# Altium PCB MAGI'sDIPBoard-Python-InstallGuide.PcbDoc
Units mil, origin at the board's own origin, x right, y up, seen from the top; angles counter-clockwise.
Board outline 6000 x 4000 mil, 2 copper layers (Top Layer, Bottom Layer); 28 components, 52 nets, 199 pads, 14 vias.
Unrouted connection lines stored in the file: 2.
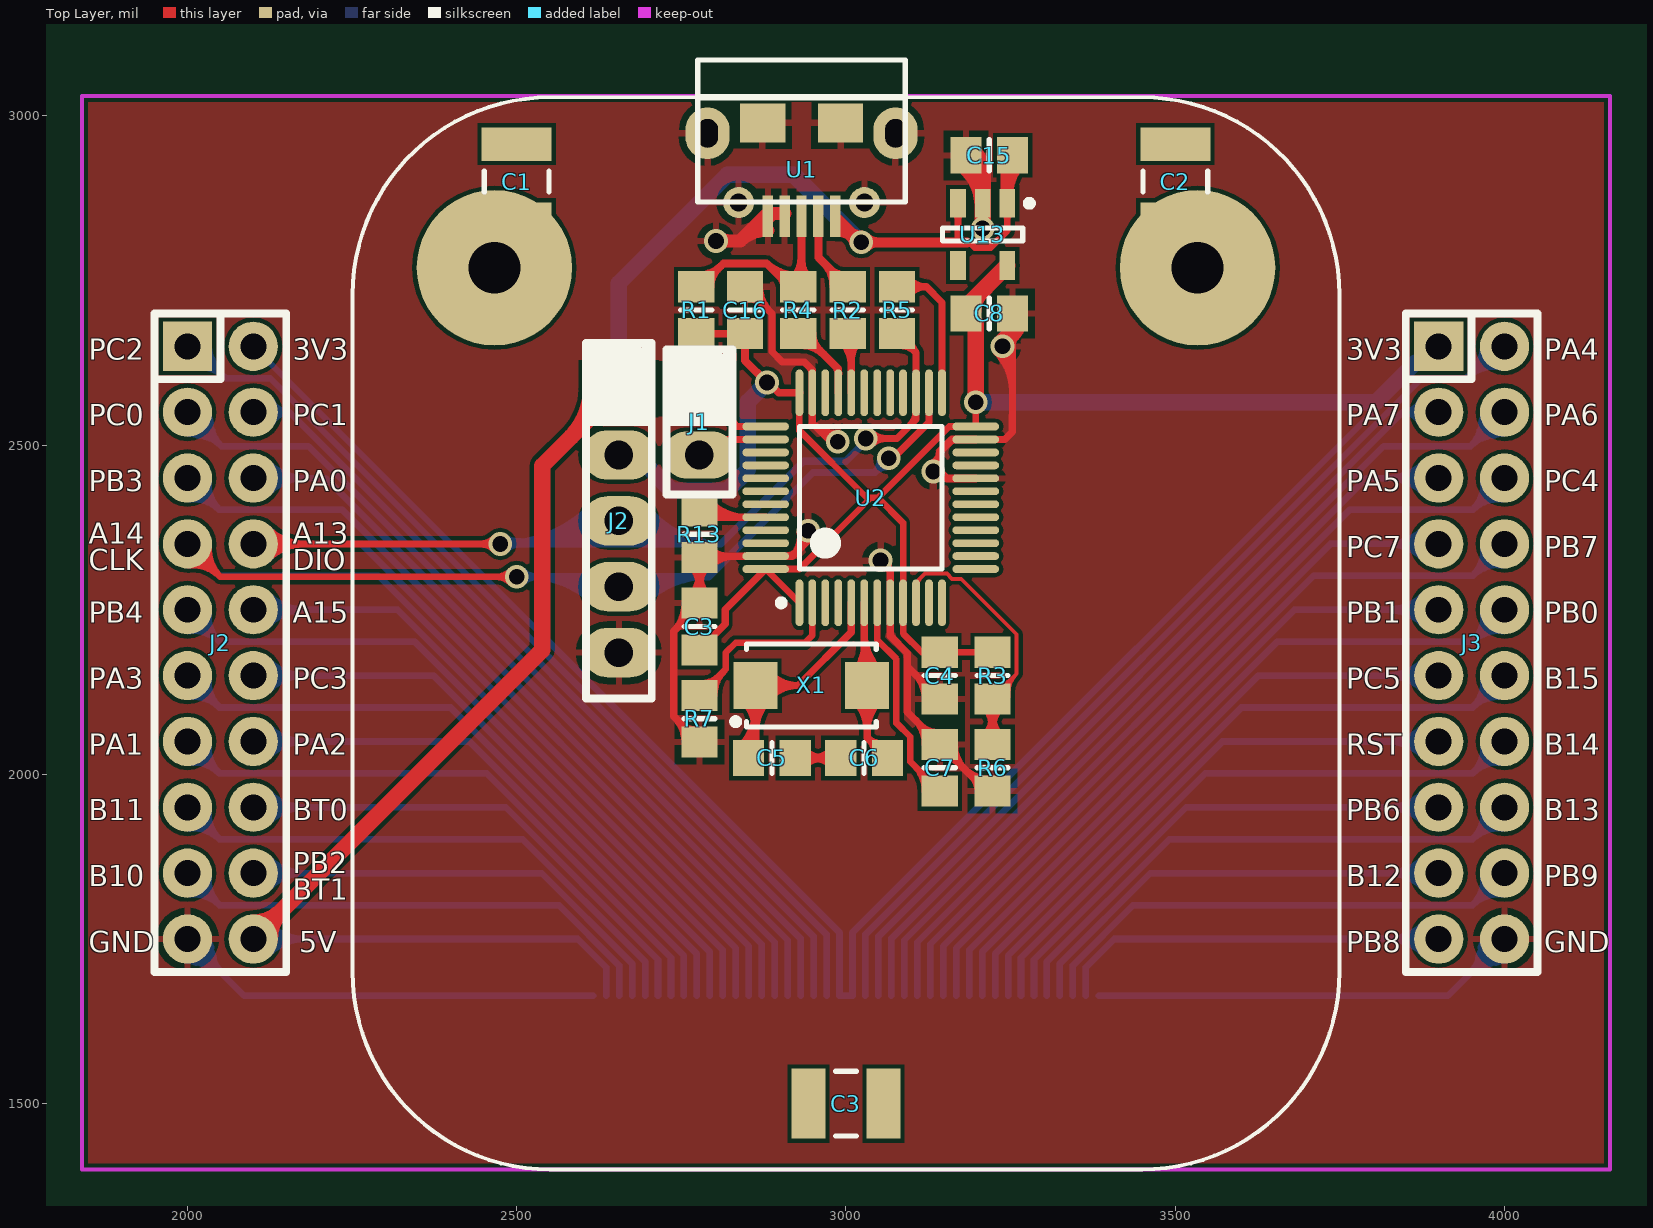
[diagram p0: Top Layer view]
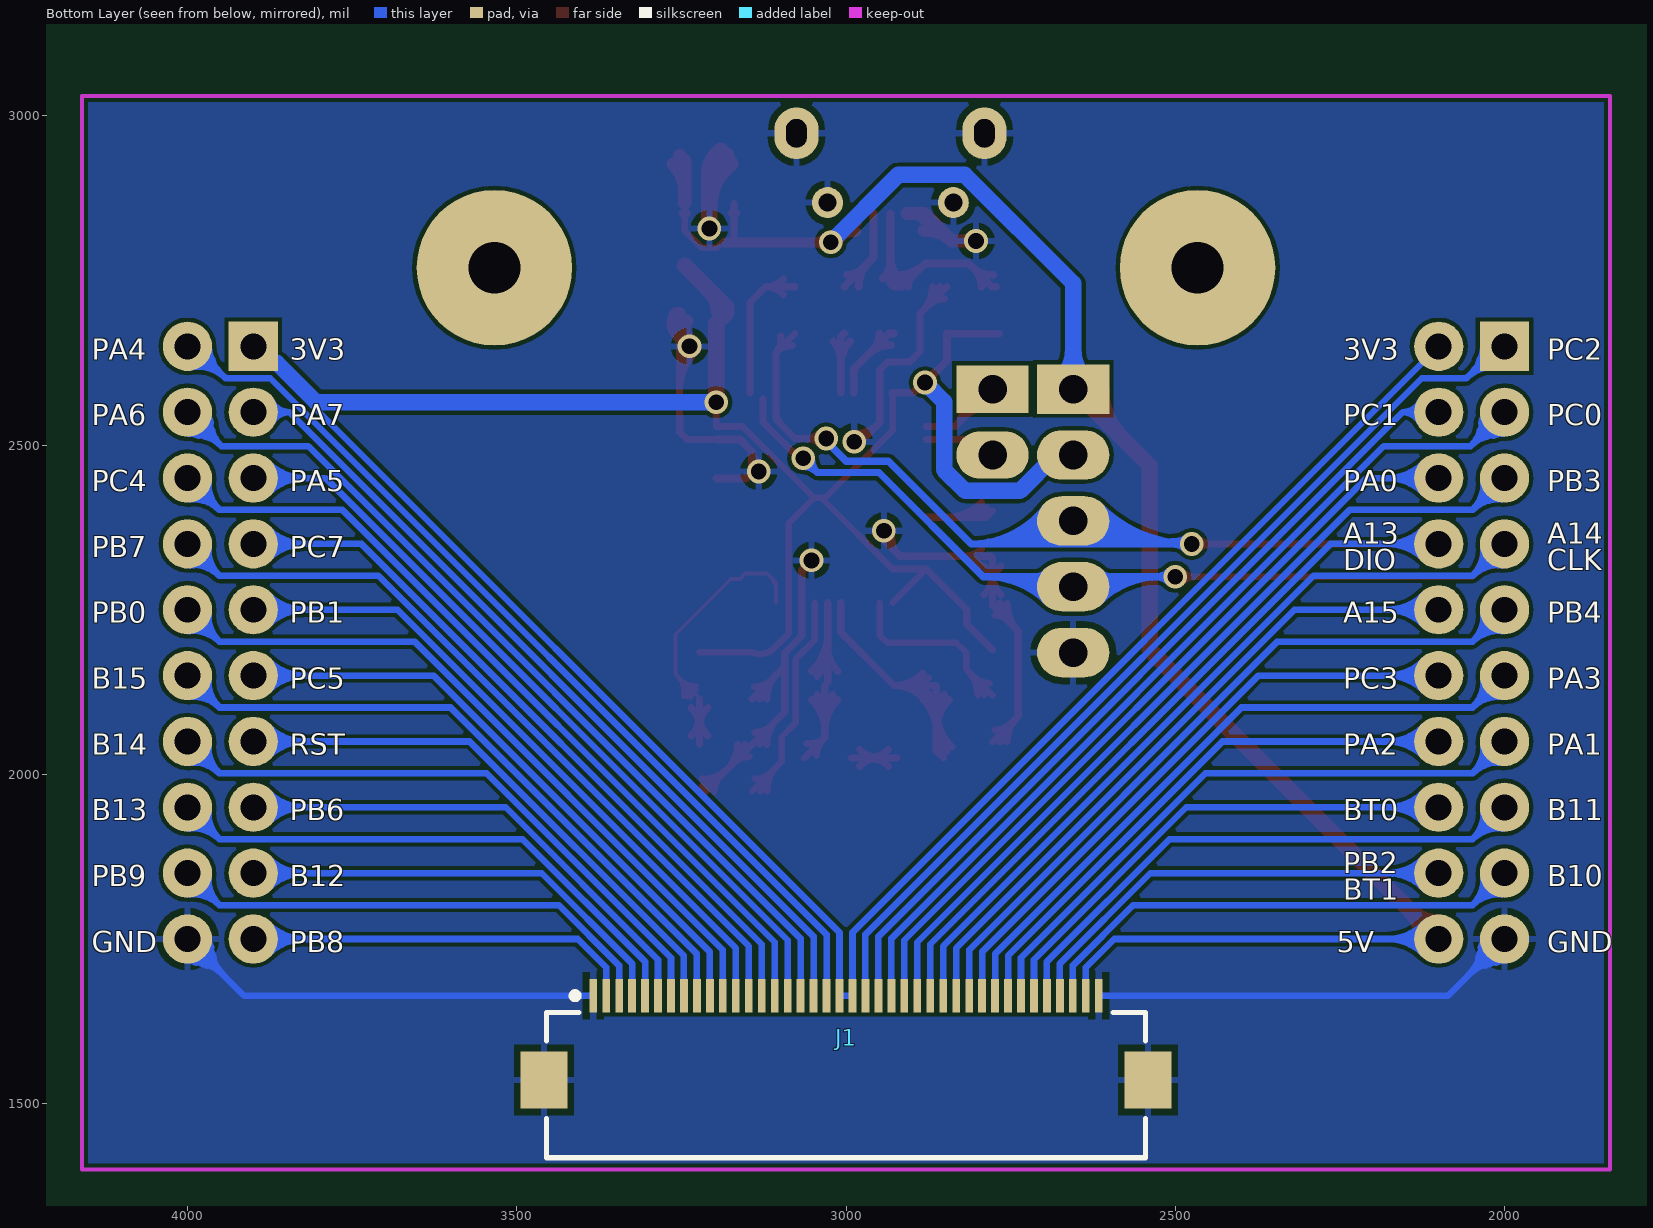
[diagram p1: Bottom Layer view, seen from below]

## Layer stack, top to bottom
Top Solder: solder mask 0.4, Solder Resist, Dk 3.5
Top Layer: signal copper 1.4
Dielectric 1: dielectric 12.6, FR-4, Dk 4.8
Bottom Layer: signal copper 1.4
Bottom Solder: solder mask 0.4, Solder Resist, Dk 3.5

## Board outline
1000,1000 7000,1000 7000,5000 1000,5000

## Design rules (kind name [scope] priority, off if disabled: settings)
Clearance [All] p1: gap=6
PolygonConnect [All] p1: connectstyle=Relief reliefconductorwidth=10 reliefentries=4 polygonreliefangle="90 Angle" airgapwidth=10
RoutingVias [All] p1: holewidth=28 width=50 viastyle="Through Hole" minholewidth=28 minwidth=50 maxholewidth=28 maxwidth=50
SolderMaskExpansion [All] p1: expansion=4
Width [All] p1: maxlimit=10000 minlimit=6 preferedwidth=10
29 further rules are at their usual default settings.

## Classes and differential pairs
component class MAGI'sDIPBoard-FPC: C1 C2 C3 J1 J2 J3

## Components (designator, comment, footprint, x,y, rotation, side; value= is the part's Value field where it differs from the comment)
C1 "22uf" C1210_N 2500,2900 r90 top
C2 "22uf" C1210_N 3500,2900 r90 top
C3 "22uf" C1210_N 3000,1500 r0 top
C3 "10uf" 6-0805_n 2777.5,2224.57 r90 top
C4 "10uf" 6-0805_N 3142.5,2150 r270 top
C5 "15PF" 6-0805_n 2887.5,2025 r180 top
C6 "15PF" 6-0805_n 3027.5,2025 r0 top
C7 "104" 6-0805_n 3142.5,2010 r270 top
C8 "10uf" 6-0805_N 3217.5,2700 r0 top
C15 "10uf" 6-0805_n 3217.5,2940 r180 top
C16 "10uf" 6-0805_n 2846.75,2705 r90 top
J1 "FPC-40P" FFC/SM0.5-2H40 3000,1600 r180 bottom
J1 "CON2" SIP2 2777.5,2585 r270 top
J2 "IDC-20" IDC-20 2000,2650 r270 top
J2 "CON5" SIP5 2655,2585 r270 top
J3 "IDC-20" IDC-20 3900,2650 r270 top
R1 "10K" 6-0805_n 2772.5,2705 r90 top
R2 "10K" 6-0805_n 3002.5,2705 r270 top
R3 "10K" 6-0805_n 3222.5,2150 r90 top
R4 "10K" 6-0805_n 2927.5,2705 r270 top
R5 "100" 6-0805_n 3077.5,2705 r90 top
R6 "10K" 6-0805_n 3222.5,2010 r90 top
R7 "10K" 6-0805_n 2777.5,2084.57 r90 top
R13 "10K" 6-0805_n 2777.5,2364.57 r90 top
U1 "MicroUSB" MicroUSB-B 2932.5,2940 r0 top
U2 "STM32F103CBT6" LQFP48_N 3037.5,2420 r90 top
U13 "MCP1802" MCP1802 3207.5,2820 r270 top
X1 "8M" 5032 2957.5,2135 r270 top

## Footprints (in the part's own frame and the unit in brackets; to place one, negate y for a bottom-side part, rotate by r counter-clockwise, add the part's x,y. Pads: shape width x height; smd on the part's side, far side on the other; paste and mask are expansions set on the pad)
6-0805_n [mm] "Chip Resistor, Body 2.0x1.2mm, IPC Medium Density"
  rect 1.2x1.4 smd: 1(-0.9,0) 2(0.9,0)
  silkscreen extent 0,-0.6 0,0.6, body extent -1.07,-0.7 1.07,0.7, height 0.7
6-0805_N [mm] "Chip Resistor, Body 2.0x1.2mm, IPC Medium Density"
  rect 1.2x1.4 smd: 1(-0.9,0) 2(0.9,0)
  silkscreen extent 0,-0.6 0,0.6, body extent -1.07,-0.7 1.07,0.7, height 0.7
5032 [mm]
  rect 1.8x1.7 smd: 1(0,-2.404) 2(0,1.896)
  silkscreen extent -1.6,-3.3 1.6,2.25
C1210_N [mm] "Chip Capacitor, Body 3.2x2.5mm, IPC Medium Density"
  rect 1.3x2.7 smd: 1(-1.45,0) 2(1.45,0)
  silkscreen extent -0.4,-1.25 0.4,1.25, body extent -1.7,-1.35 1.7,1.35, height 1.5
FFC/SM0.5-2H40 [mm] "Connector; FH12 Series; 40 Position; 0.5mm Spaced Bottom Contact"
  rect 0.3x1.3 smd: 1(-9.75,1.625) 2(-9.25,1.625) 3(-8.75,1.625) 4(-8.25,1.625) 5(-7.75,1.625) 6(-7.25,1.625) 7(-6.75,1.625) 8(-6.25,1.625) 9(-5.75,1.625) 10(-5.25,1.625) 11(-4.75,1.625) 12(-4.25,1.625) 13(-3.75,1.625) 14(-3.25,1.625) 15(-2.75,1.625) 16(-2.25,1.625) 17(-1.75,1.625) 18(-1.25,1.625) 19(-0.75,1.625) 20(-0.25,1.625) 21(0.25,1.625) 22(0.75,1.625) 23(1.25,1.625) 24(1.75,1.625) 25(2.25,1.625) 26(2.75,1.625) 27(3.25,1.625) 28(3.75,1.625) 29(4.25,1.625) 30(4.75,1.625) 31(5.25,1.625) 32(5.75,1.625) 33(6.25,1.625) 34(6.75,1.625) 35(7.25,1.625) 36(7.75,1.625) 37(8.25,1.625) 38(8.75,1.625) 39(9.25,1.625) 40(9.75,1.625)
  rect 1.8x2.2 smd: 41(-11.65,-1.625) 42(11.65,-1.625)
  silkscreen extent -11.55,-4.62 11.55,1.75, body extent -11.55,-4.62 11.55,0.97, height 2
IDC-20 [mm]
  rect 1.9x1.9 hole 1: 1(0,0)
  round 1.9 hole 1: 2(0,2.54) 3(2.54,0) 4(2.54,2.54) 5(5.08,0) 6(5.08,2.54) 7(7.62,0) 8(7.62,2.54) 9(10.16,0) 10(10.16,2.54) 11(12.7,0) 12(12.7,2.54) 13(15.24,0) 14(15.24,2.54) 15(17.78,0) 16(17.78,2.54) 17(20.32,0) 18(20.32,2.54) 19(22.86,0) 20(22.86,2.54)
  silkscreen extent -1.27,-1.27 24.13,3.81
LQFP48_N [mm] "Thin QFP, 48-Leads, Body 7x7mm, Pitch 0.5mm, IPC Medium Density"
  oval 1.8x0.3 smd: 1(-4.05,2.75) 2(-4.05,2.25) 3(-4.05,1.75) 4(-4.05,1.25) 5(-4.05,0.75) 6(-4.05,0.25) 7(-4.05,-0.25) 8(-4.05,-0.75) 9(-4.05,-1.25) 10(-4.05,-1.75) 11(-4.05,-2.25) 12(-4.05,-2.75) 25(4.05,-2.75) 26(4.05,-2.25) 27(4.05,-1.75) 28(4.05,-1.25) 29(4.05,-0.75) 30(4.05,-0.25) 31(4.05,0.25) 32(4.05,0.75) 33(4.05,1.25) 34(4.05,1.75) 35(4.05,2.25) 36(4.05,2.75)
  oval 0.3x1.8 smd: 13(-2.75,-4.05) 14(-2.25,-4.05) 15(-1.75,-4.05) 16(-1.25,-4.05) 17(-0.75,-4.05) 18(-0.25,-4.05) 19(0.25,-4.05) 20(0.75,-4.05) 21(1.25,-4.05) 22(1.75,-4.05) 23(2.25,-4.05) 24(2.75,-4.05) 37(2.75,4.05) 38(2.25,4.05) 39(1.75,4.05) 40(1.25,4.05) 41(0.75,4.05) 42(0.25,4.05) 43(-0.25,4.05) 44(-0.75,4.05) 45(-1.25,4.05) 46(-1.75,4.05) 47(-2.25,4.05) 48(-2.75,4.05)
  silkscreen extent -4.17,-2.75 2.75,3.57, body extent -3.5,-3.5 3.5,3.5, height 1.6
MCP1802 [mm] "SOT23, 5-Leads, Body 2.90x2.70mm, Pitch 0.95mm, IPC Medium Density"
  rect 1.1x0.6 smd: 1(-1.2,0.95) 2(-1.2,0) 3(-1.2,-0.95) 4(1.2,-0.95) 5(1.2,0.95)
  silkscreen extent -1.32,-1.55 0.25,1.93, body extent -0.9,-1.55 0.9,1.55, height 1.45
MicroUSB-B [mm]
  oval 1.7x2 hole 0.8 slot 1.1 at 90 deg: 0(-3.625,0.85) 0(3.625,0.85)
  oval 1.7x2 on Top Paste: 0(-3.625,0.85) 0(3.625,0.85)
  round 1.2 hole 0.7: 0(-2.425,-1.825) 0(2.425,-1.825)
  round 1.2 on Top Paste: 0(-2.425,-1.825) 0(2.425,-1.825)
  rect 1.75x1.5 smd: 0(-1.5,1.25) 0(1.5,1.25)
  rect 0.4x1.6 smd: 1(1.3,-2.35) 2(0.65,-2.35) 3(0,-2.35) 4(-0.65,-2.35) 5(-1.3,-2.35)
  silkscreen extent -4,-1.8 4,3.67, body extent -4.1,-1.93 4.1,3.77, height 3
SIP2 [mil]
  rect 72x110 hole 43.31: 1(0,0)
  oval 72x110 hole 43.31: 2(100,0)
  silkscreen extent -60,-50 160,50
SIP5 [mil]
  rect 75x110 hole 43.31: 1(0,0)
  oval 75x110 hole 43.31: 2(100,0) 3(200,0) 4(300,0) 5(400,0)
  silkscreen extent -70,-50 470,50

## Part data
C1 C2 C3 C3 C4 C8 C15 C16: library part "CAPACITOR POL", "Capacitor"
C5 C6 C7: library part CAP
J1: library part CON40, "Connector"
J1 J2: "Connector"
R1 R2 R3 R4 R5 R6 R7 R13: library part RES
U1: library part MicroUSB2.0
U2: "STM32 ARM-based 32-bit MCU with 128 Kbytes Flash, 48-pin LQFP, Industrial Temperature"
X1: library part CRYSTAL

## Free pads (board coordinates)
  round 236.22 hole 78.74: 0(2466.14,2769.29) 0(3533.86,2769.29)

## Via types
v1: diameter 36, hole 24, Top Layer to Bottom Layer, 14 vias

## Nets (pads, with @x,y where several pads share a name; then routed paths per layer and width w, separated by ;. In a path a pad name is that pad's centre, name@x,y a point inside that pad or via, vN(x,y) a via of type N, cw(c..) or ccw(c..) an arc to the next point about the centre after c; other vN are vias at no path point)
3.3V: C3.1@2777.5,2189.13 C4.1 C8.1 C16.1 J1.20 J1.21 J2.2 J3.1 R1.1 R3.2 U2.1 U2.9 U2.24 U2.36 U2.48 U13.5 | length 5563
  Top Layer w10: U2.48 U2.1 ; 2929.23,2311.73 3037.5,2420 ; U2.36 2929.23,2522.26 3031.49,2420 3037.5,2420 ; 3109.72,2191.11 ccw(c3130.04,2211.43) C4.1@3138.99,2184.12 ; C4.1@3115.4,2185.43 3086.71,2214.12 U2.9 3086.71,2381.75 3048.46,2420 ; C4.1 R3.2 ; v1(3196.95,2565) U2.24 3156.73,2528.27 3048.46,2420 ; 3037.5,2420 3048.46,2420
  Top Layer w11: C3.1@2777.5,2189.13 2816.56,2228.19 2816.56,2250.24 U2.48 2929.23,2311.73
  Top Layer w12: R1.1@2767.5,2669.13 C16.1@2842.5,2669.13 ; C16.1 2846.75,2628.25 v1(2880,2595) ; v1@2881.25,2596.25 2898.05,2579.45 U2.36
  Top Layer w25: C8.1@3193.19,2703.94 cw(c3234.48,2703.94) 3205.28,2733.14 ; v1(3196.95,2565) 3196.95,2685.12 C8.1 3182.07,2709.92 U13.5
  Bottom Layer w10: J2.2@2100,2650 2990.16,1759.84 J1.21 J1.20 3009.84,1759.84 J3.1@3875.1,2625.1
  Bottom Layer w25: J2.2@2655,2485 2681.43,2485 2735.93,2430.5 2819.07,2430.5 2851,2462.43 2851,2566 v1(2880,2595) ; v1(3196.95,2565) 3804.39,2565 3864.49,2625.1 3875.1,2625.1 J3.1
5V: C15.1 J1.39 J2.1@2655,2585 J2.20 U1.1 U13.1 U13.3 | length 3739.2
  Top Layer w10: U1.1 U1.1@2983.68,2851.89 ; U13.3@3165.28,2852.59 cw(c3153.65,2840.96) 3170.1,2840.96 cw(c3186.54,2840.96) U13.3@3174.91,2852.59 ; 3170.1,2807.91 U13.3 ; 3183.95,2807.91 3187.49,2807.91 3195.49,2799.91 3219.51,2799.91 3244.9,2825.3 U13.1 ; U13.1@3240.09,2852.59 cw(c3228.46,2840.96) 3244.9,2840.96 cw(c3261.35,2840.96) U13.1@3249.72,2852.59
  Top Layer w15: U1.1@2983.17,2838.48 cw(c2983.91,2817.34) 2998.87,2832.29 ; U1.1@2983.69,2823.48 cw(c2985.57,2770.23) v1(3023.25,2807.91) ; U1.1 v1(3023.25,2807.91) ; v1@3012.75,2807.91 ccw(c2987.4,2807.91) 3005.33,2825.83 ccw(c3023.25,2843.76) v1@3023.25,2818.41 ; v1@3013.11,2805.19 ccw(c2988.62,2798.63) 3001.3,2820.59 ccw(c3013.97,2842.54) v1@3020.53,2818.05 ; v1@3030.68,2800.48 cw(c3048.6,2782.56) 3048.6,2807.91 cw(c3048.6,2833.26) v1@3030.68,2815.33 ; 3183.95,2807.91 3170.1,2807.91 v1(3023.25,2807.91)
  Top Layer w20: U13.1 3244.9,2931.97 C15.1 ; U13.1@3244.9,2883.79 cw(c3305.2,2883.79) C15.1@3262.56,2926.43
  Top Layer w25: J2.20 2538.69,2188.69 2538.69,2468.69 J2.1@2655,2585 ; J2.20@2100,1774.9 ccw(c2100,1835.02) 2142.51,1792.51 ccw(c2185.02,1750) J2.20@2124.9,1750 ; 2582.45,2512.45 ccw(c2509.9,2585) J2.1@2612.5,2585
  Bottom Layer w10: J2.20 2592.71,1750 2635.83,1706.88 J1.39 ; 2154.08,1750 ccw(c2154.08,1695.92) 2115.84,1734.16 cw(c2154.08,1695.92) 2154.08,1750 ; 2154.08,1750 cw(c2154.08,1804.08) 2115.84,1765.84 ccw(c2154.08,1804.08) 2154.08,1750 ; 2178.22,1750 ccw(c2178.22,1671.78) 2122.91,1727.09 cw(c2178.22,1671.78) 2178.22,1750 ; 2178.22,1750 cw(c2178.22,1828.22) 2122.91,1772.91 ccw(c2178.22,1828.22) 2178.22,1750
  Bottom Layer w25: J2.1@2637.32,2602.68 ccw(c2594.64,2645.36) 2655,2645.36 ccw(c2715.36,2645.36) J2.1@2672.68,2602.68 ; J2.1@2655,2585 2655,2745.69 2819.58,2910.27 2920.89,2910.27 v1(3023.25,2807.91)
BOOT0: J1.35 J2.16 R13.2 U2.44 | length 1384.2
  Top Layer w11: R13.2 2787.03,2390.47 U2.44 ; R13.2@2786.47,2405.04 ccw(c2821.63,2440.2) 2821.63,2390.47 ; R13.2@2794.25,2412.81 ccw(c2848.19,2466.75) U2.44@2848.19,2390.47
  Bottom Layer w10: J2.16 2483.22,1950 2714.57,1718.65 J1.35 ; 2154.08,1950 ccw(c2154.08,1895.92) 2115.84,1934.16 cw(c2154.08,1895.92) 2154.08,1950 ; 2154.08,1950 cw(c2154.08,2004.08) 2115.84,1965.84 ccw(c2154.08,2004.08) 2154.08,1950 ; 2178.22,1950 ccw(c2178.22,1871.78) 2122.91,1927.09 cw(c2178.22,1871.78) 2178.22,1950 ; 2178.22,1950 cw(c2178.22,2028.22) 2122.91,1972.91 ccw(c2178.22,2028.22) 2178.22,1950
GND: C3.2@2777.5,2260 C4.2 C7.1 C8.2 C15.2 C16.2 J1.1@3383.86,1663.98 J1.40 J1.41 J1.42 J2.5@2655,2185 J2.19 J3.20 R6.1 R7.1 R13.1 U1.0@2789.78,2973.46 U1.0@2837.03,2868.15 U1.0@2873.44,2989.21 U1.0@2991.56,2989.21 U1.0@3027.97,2868.15 U1.0@3075.22,2973.46 U1.4 U1.5 U2.8 U2.20 U2.23 U2.35 U2.47 U13.2 | length 6493.8
  Top Layer w11: 2739.84,2086.79 cw(c2702.19,2049.13) R7.1@2755.44,2049.13 ; 2749.35,2077.29 ccw(c2773.56,2101.5) R7.1@2773.56,2067.26 ; 2755.19,2234.27 cw(c2773.56,2215.89) C3.2@2773.56,2241.88 ; C3.2@2755.44,2259.66 cw(c2697.37,2258.59) 2738.44,2217.52 ; 2756.74,2235.82 ccw(c2733.3,2259.26) C3.2@2766.44,2259.87 ; R7.1@2758.62,2068.01 cw(c2739.74,2049.13) R7.1@2766.44,2049.13 ; C3.2@2764.69,2272.81 ccw(c2733.75,2303.75) 2777.5,2303.75 ccw(c2821.25,2303.75) C3.2@2790.31,2272.81 ; R13.1@2764.69,2316.32 cw(c2733.75,2285.38) 2777.5,2285.38 cw(c2821.25,2285.38) R13.1@2790.31,2316.32 ; R7.1 2738.44,2088.19 2738.44,2217.52 ; R13.1@2794.25,2316.32 cw(c2830.7,2279.87) 2830.7,2331.42 ; R13.1@2794.25,2341.95 ccw(c2819.67,2367.37) 2819.67,2331.42 ; C16.2 2887.5,2699.68 2887.5,2642.12 2903.24,2626.38 2936.44,2626.38 2948.92,2613.9 U2.35 2948.92,2533.58 v1@2977.5,2505 ; C16.2@2850.69,2722.31 cw(c2850.69,2688.07) 2874.9,2712.28 ; C16.2@2857.81,2740.43 ccw(c2884.51,2740.43) C16.2@2865.63,2721.56 ; C16.2@2868.81,2740.43 ccw(c2922.06,2740.43) 2884.41,2702.78 ; U2.47@2907.58,2331.82 ccw(c2907.58,2360.18) 2927.63,2340.13 ; v1@2930.21,2367.73 cw(c2890.03,2360.31) 2918.92,2331.42 ; 2933.72,2346.22 ccw(c2915.01,2364.92) v1@2941.02,2369.73 ; 2944.74,2618.08 cw(c2935.63,2608.98) U2.35@2948.51,2608.98 ; v1@2947.5,2360 2918.92,2331.42 ; 2949.09,2533.41 ccw(c2987.5,2571.82) v1@2987.5,2517.5 ; 2967.87,2514.63 ccw(c2987.5,2534.26) v1@2987.5,2506.5 ; v1(3052.5,2325) 3067.03,2310.47 ; v1@3056.29,2313.09 cw(c3059.51,2302.95) 3067.03,2310.47 ; v1@3064.41,2321.21 ccw(c3074.55,2317.99) 3067.03,2310.47 ; 3104.84,2083.09 cw(c3067.19,2045.43) C7.1@3120.44,2045.43 ; 3104.84,2152.22 cw(c3067.19,2114.57) C4.2@3120.44,2114.57 ; 3114.35,2073.59 ccw(c3138.56,2097.8) C7.1@3138.56,2063.56 ; 3114.35,2142.72 ccw(c3138.56,2166.93) C4.2@3138.56,2132.69 ; C7.1@3123.62,2064.31 cw(c3104.74,2045.43) C7.1@3131.44,2045.43 ; C4.2@3123.62,2133.44 cw(c3104.74,2114.57) C4.2@3131.44,2114.57 ; C4.2 3093.11,2163.96 ; C7.1@3146.44,2027.31 cw(c3146.44,1993.07) 3170.65,2017.28 ; C7.1@3153.56,2045.43 ccw(c3180.26,2045.43) C7.1@3161.38,2026.56 ; C7.1@3164.56,2045.43 ccw(c3217.81,2045.43) 3180.16,2007.78 ; 3178.76,2009.18 ccw(c3218.56,2048.99) R6.1@3218.56,1992.69 ; 3191.3,1996.63 cw(c3169.24,1974.57) R6.1@3200.44,1974.57 ; U2.23 3241.08,2508.58 3252.5,2520 3252.5,2545 3252.93,2545.43 C8.2 cw(c3206.72,2700) v1@3230.95,2660.64 ; R6.1@3197.53,1990.4 ccw(c3218.56,2011.43) R6.1@3218.56,1981.69 ; R6.1 3213.37,1974.57 C7.1 3093.11,2094.82 3093.11,2163.96 ; v1@3228.66,2641.16 cw(c3170.06,2582.56) 3252.93,2582.56 ; v1@3236.44,2648.94 cw(c3196.62,2609.12) 3252.93,2609.12 ; v1@3236.71,2651.28 ccw(c3218.84,2680.31) C8.2@3252.93,2680.31 ; v1@3236.94,2651.39 ccw(c3222.74,2686.71) C8.2@3259.51,2676.86 ; C8.2@3240.12,2683.25 cw(c3209.18,2652.31) 3252.93,2652.31 cw(c3296.68,2652.31) C8.2@3265.75,2683.25 ; v1@3242.48,2641.91 ccw(c3230.96,2660.62) 3252.93,2660.62 ; v1@3244.22,2656.72 cw(c3223.17,2635.67) 3252.93,2635.67 ; 3248.25,2632.54 ccw(c3243.08,2640.93) v1@3252.93,2640.93 ; 2738.44,2217.52 2777.5,2256.58 2777.5,2260 R13.1 2779.78,2331.42 U2.47 2918.92,2331.42 ; 3067.03,2310.47 U2.8 3067.03,2210.47 3093.11,2184.39 3093.11,2163.96
  Top Layer w12: v1@3128.89,2471.45 ccw(c3123.05,2490) 3142.5,2490 ; v1@3139.75,2450.44 cw(c3145.84,2442.4) 3152.97,2449.53 ; 3156.76,2504.26 cw(c3167.42,2493.6) U2.23@3167.42,2508.68 ; U2.20 3152.97,2449.53 ; U2.23 3161.08,2508.58 3142.5,2490 ; 3142.5,2490 3142.5,2460 3152.97,2449.53
  Top Layer w20: v1(2802.5,2810) 2839.43,2810 ; v1@2808.16,2804.34 cw(c2821.81,2790.69) 2821.81,2810 cw(c2821.81,2829.31) v1@2808.16,2815.66 ; 2870.93,2841.5 cw(c2881.72,2830.71) U1.5@2882.61,2845.95 ; U1.5@2881.44,2825.98 ccw(c2878.23,2771.2) 2839.43,2810 ; U1.4@2906.91,2851.89 2881.32,2851.89 2839.43,2810 ; v1@3232.38,2656.15 ccw(c3195.88,2700) C8.2 3252.93,2665.43 ; v1@3234.52,2657.43 ccw(c3219.92,2693.85) C8.2@3257.83,2683.69 ; v1@3235.43,2657.73 ccw(c3224.79,2697.43) C8.2@3260.38,2676.88 ; v1@3236.83,2657.97 ccw(c3234.71,2683.36) 3256.77,2670.62 ; v1@3237.5,2658 ccw(c3237.5,2677.31) 3251.16,2663.66 ccw(c3264.81,2650) v1@3245.5,2650 ; C8.2@3241.52,2688.62 cw(c3215.71,2671.79) v1(3237.5,2650) 3252.93,2665.43 ; C8.2@3243.81,2685.95 cw(c3225.31,2665.44) 3252.93,2665.44 ; 3254.93,2667.43 ccw(c3236.81,2685.55) C8.2@3258.28,2699.55 ; C8.2@3262.06,2685.95 ccw(c3280.55,2665.44) 3252.93,2665.44
  Top Layer w25: C15.2@3175.37,2927.18 cw(c3126.73,2862.7) U13.2@3207.5,2862.7 ; C15.2 3207.5,2914.57 ; C15.2@3182.16,2924.94 cw(c3182.45,2889.52) 3207.5,2914.57 ; C15.2@3190.42,2947.14 cw(c3164.57,2912.87) 3207.5,2912.87 ; v1(3207.5,2828.91) U13.2 3207.5,2914.57
  Bottom Layer w10: J2.19@1982.76,1746.47 ccw(c2024.28,1754.97) 2013.31,1714.03 ; J2.19@1992.56,1748.48 ccw(c2042.01,1758.6) 2028.95,1709.84 ; J2.19 2086.03,1663.98 J1.40 ; J2.19@2001.52,1757.44 cw(c1991.4,1707.99) 2040.16,1721.06 ; J2.19@2003.53,1767.24 cw(c1995.03,1725.72) 2035.97,1736.69 ; J1.1@3383.86,1663.98 3913.98,1663.98 J3.20 ; 3959.84,1721.06 cw(c4008.6,1707.99) J3.20@3998.48,1757.44 ; 3964.03,1736.69 cw(c4004.97,1725.72) J3.20@3996.47,1767.24 ; 3971.06,1709.84 ccw(c3957.99,1758.6) J3.20@4007.44,1748.48 ; 3986.69,1714.03 ccw(c3975.72,1754.97) J3.20@4017.24,1746.47 ; 2038.25,1711.76 ccw(c2000,1673.51) 2000,1727.6 cw(c2000,1673.51) 2038.25,1711.76 ; 2038.24,1711.76 cw(c2076.48,1750) 2022.4,1750 ccw(c2076.48,1750) 2038.24,1711.76 ; 2055.32,1694.69 ccw(c2000,1639.37) 2000,1717.6 cw(c2000,1639.37) 2055.32,1694.69 ; 2055.31,1694.69 cw(c2110.62,1750) 2032.4,1750 ccw(c2110.62,1750) 2055.31,1694.69 ; 3944.69,1694.69 ccw(c3889.37,1750) 3967.6,1750 cw(c3889.37,1750) 3944.69,1694.69 ; 3944.69,1694.69 cw(c4000,1639.37) 4000,1717.6 ccw(c4000,1639.37) 3944.69,1694.69 ; 3961.76,1711.76 ccw(c3923.52,1750) 3977.6,1750 cw(c3923.52,1750) 3961.76,1711.76 ; 3961.76,1711.76 cw(c4000,1673.52) 4000,1727.6 ccw(c4000,1673.52) 3961.76,1711.76
  other v1: 2942.5,2370 3132.5,2460 2987.5,2505
JTCK: J1.2@2777.5,2485 U2.38 | length 110.3
  Top Layer w11: J1.2@2777.5,2485 2801.08,2508.58 U2.38
JTMS: J1.1@2777.5,2585 U2.37 | length 235.8
  Top Layer w11: J1.1@2777.5,2585 2834.23,2528.27 ; J1.1@2796.5,2554.5 cw(c2796.5,2526.74) 2816.13,2546.37 ; J1.1@2814.62,2577.8 ccw(c2847.17,2564.86) 2822.4,2540.09 ; J1.1@2824.84,2573.74 ccw(c2864.1,2558.14) 2834.23,2528.27 ; U2.37 2834.23,2528.27
LED: U2.30
NetC5_1: C5.1 C6.1 | length 206.6
  Top Layer w11: C5.1 C6.1 ; C5.1@2935.75,2012.19 cw(c2966.68,1981.25) 2966.68,2025 cw(c2966.68,2068.75) C5.1@2935.75,2037.81 ; C6.1@2979.25,2012.19 ccw(c2948.32,1981.25) 2948.32,2025 ccw(c2948.32,2068.75) C6.1@2979.25,2037.81
NetR2_2: R2.2 U2.32 | length 159.2
  Top Layer w12: R2.2@2993.98,2657.11 cw(c2960.19,2623.32) 3007.97,2623.32 ; R2.2 3007.97,2664.09 U2.32 ; 3007.97,2630.73 cw(c3045.27,2630.73) R2.2@3018.9,2657.11
NetR4_2: R4.2 U2.33 | length 198.6
  Top Layer w12: R4.2 2934.35,2669.57 2988.29,2615.63 U2.33 ; R4.2@2931.44,2651.94 cw(c2931.44,2602.37) 2966.49,2637.42 ; R4.2@2949.06,2669.57 ccw(c2984.57,2669.57) 2959.46,2644.45 ; 2983.75,2620.17 cw(c2972.55,2608.98) U2.33@2988.38,2608.98
NetR5_2: R5.2 U2.25 | length 276.6
  Top Layer w11: R5.2 3122.07,2740.43 ; R5.2@3094.92,2728.33 cw(c3122.06,2703.95) 3122.06,2740.43 ; R5.2@3094.92,2752.54 ccw(c3122.06,2776.91) 3122.06,2740.43 ; U2.25 3145.77,2716.73 3122.07,2740.43
NetR7_2: R7.2 U2.2 | length 367.5
  Top Layer w10: R7.2 2817.5,2160 2817.5,2185 2832.5,2200 2937.5,2200 2948.92,2211.42 U2.2 ; R7.2@2781.44,2138.62 ccw(c2781.44,2174.07) 2806.51,2149.01 ; R7.2@2790.06,2120 cw(c2820.38,2120) R7.2@2798.94,2141.44 ; R7.2@2800.06,2120 cw(c2854.52,2120) 2816.01,2158.51
NRST: C7.2 J1.8 J3.13 U2.7 | length 1684.8
  Top Layer w10: U2.7 3047.34,2204.26 3076.61,2174.99 3076.61,2078.06 3097.56,2057.12 3097.56,2019.51 C7.2 ; 3103.99,2013.08 cw(c3065.48,1974.57) C7.2@3119.94,1974.57 ; 3113.49,2003.57 ccw(c3138.56,2028.64) C7.2@3138.56,1993.19 ; C7.2@3121.06,1996.01 cw(c3099.62,1974.57) C7.2@3129.94,1974.57
  Bottom Layer w10: J1.8 3246.06,1724.54 3571.53,2050 J3.13 ; 3821.78,2050 ccw(c3821.78,2128.22) 3877.09,2072.91 cw(c3821.78,2128.22) 3821.78,2050 ; 3821.78,2050 cw(c3821.78,1971.78) 3877.09,2027.09 ccw(c3821.78,1971.78) 3821.78,2050 ; 3845.92,2050 ccw(c3845.92,2104.08) 3884.16,2065.84 cw(c3845.92,2104.08) 3845.92,2050 ; 3845.92,2050 cw(c3845.92,1995.92) 3884.16,2034.16 ccw(c3845.92,1995.92) 3845.92,2050
OSC_IN: C5.2 U2.5 X1.1 | length 771.6
  Top Layer w11: C5.2@2839.25,2041.75 ccw(c2782.27,2098.73) 2862.85,2098.73 ; X1.1@2843.08,2113.26 cw(c2795.34,2065.52) 2862.85,2065.52 cw(c2930.37,2065.52) X1.1@2882.63,2113.26 ; C5.2@2847.03,2033.97 ccw(c2808.83,2072.18) 2862.85,2072.18 ; X1.1@2850.86,2121.04 cw(c2821.9,2092.08) 2862.85,2092.08 cw(c2903.81,2092.08) X1.1@2874.85,2121.04 ; C5.2 2862.85,2035.79 X1.1 2927.07,2135 ; X1.1@2875.27,2123.44 cw(c2901.81,2098.75) 2901.81,2135 cw(c2901.81,2171.25) X1.1@2875.27,2146.56 ; X1.1@2883.33,2115.95 cw(c2927.07,2075.25) 2927.07,2135 ; X1.1@2883.33,2154.05 ccw(c2927.07,2194.75) 2927.07,2135 ; U2.5 3007.97,2215.9 2927.07,2135
OSC_OUT: C6.2 U2.6 X1.2 | length 628.1
  Top Layer w11: X1.2@3012.37,2113.26 cw(c2964.63,2065.52) 3032.15,2065.52 cw(c3099.66,2065.52) X1.2@3051.92,2113.26 ; X1.2@3012.37,2156.74 ccw(c2975.47,2193.65) 3027.66,2193.65 ; X1.2@3020.15,2121.04 cw(c2991.19,2092.08) 3032.15,2092.08 cw(c3073.1,2092.08) X1.2@3044.14,2121.04 ; 3027.66,2188.76 ccw(c3083.94,2188.76) X1.2@3044.14,2148.96 ; 3027.66,2215.32 ccw(c3110.49,2215.32) X1.2@3051.92,2156.74 ; U2.6 3027.66,2139.49 X1.2 3032.15,2055.79 ; 3034.78,2053.15 cw(c3010.57,2028.94) C6.2@3044.81,2028.94 ; C6.2@3060,2046.82 cw(c3054.81,2078.45) 3032.15,2055.79 ; C6.2 3032.15,2055.79
PA0: J1.25 J2.6 | length 1601.9
  Bottom Layer w10: J2.6 2209.49,2450 2911.42,1748.07 J1.25 ; 2154.08,2450 ccw(c2154.08,2395.92) 2115.84,2434.16 cw(c2154.08,2395.92) 2154.08,2450 ; 2154.08,2450 cw(c2154.08,2504.08) 2115.84,2465.84 ccw(c2154.08,2504.08) 2154.08,2450 ; 2178.22,2450 ccw(c2178.22,2371.78) 2122.91,2427.09 cw(c2178.22,2371.78) 2178.22,2450 ; 2178.22,2450 cw(c2178.22,2528.22) 2122.91,2472.91 ccw(c2178.22,2528.22) 2178.22,2450
PA0-VREF: R3.1 R6.2 U2.10 | length 692.1
  Top Layer w6: U2.10 3106.4,2291.48 3119.91,2304.99 3153.09,2304.99 3161.25,2296.83 3175.02,2296.83 3259.06,2212.78 3259.06,2152.81 ; U2.10@3109.3,2290.08 cw(c3119.69,2290.08) 3112.34,2297.42 ; R3.1 3222.5,2116.25 3259.06,2152.81 ; R3.1@3226.44,2129.19 ccw(c3226.44,2150.92) R3.1@3241.8,2135.55 ; R3.1@3226.44,2135.19 ccw(c3226.44,2171.4) 3252.04,2145.8 ; R3.1@3234.99,2115.66 cw(c3258.61,2118.69) R3.1@3241.77,2135.52 ; R3.1@3240.94,2116.42 cw(c3273.94,2120.65) 3250.41,2144.17 ; R3.1@3246.89,2117.19 cw(c3289.26,2122.61) 3259.06,2152.81
  Top Layer w11: R6.2@3209.69,2058.25 ccw(c3178.75,2089.18) 3222.5,2089.18 ccw(c3266.25,2089.18) R6.2@3235.31,2058.25 ; R3.1@3209.69,2101.75 cw(c3178.75,2070.82) 3222.5,2070.82 cw(c3266.25,2070.82) R3.1@3235.31,2101.75 ; R6.2 R3.1
PA1: J1.34 J2.13 | length 1263.5
  Bottom Layer w10: J2.13 2048.4,2001.6 ; J1.34 2734.25,1721.59 2454.25,2001.6 2048.4,2001.6 ; 2033.46,2016.54 ccw(c2006.04,1989.11) 2002.21,2027.71 cw(c2006.04,1989.11) 2033.46,2016.54 ; 2033.46,2016.54 cw(c2060.89,2043.96) 2022.29,2047.79 ccw(c2060.89,2043.96) 2033.46,2016.54 ; 2048.4,2001.6 ccw(c2008.74,1961.94) 2003.2,2017.76 cw(c2008.74,1961.94) 2048.4,2001.6 ; 2048.4,2001.6 cw(c2088.07,2041.27) 2032.24,2046.8 ccw(c2088.07,2041.27) 2048.4,2001.6
PA2: J1.33 J2.14 | length 1265
  Bottom Layer w10: J2.14 2428.47,2050 2753.94,1724.54 J1.33 ; 2154.08,2050 ccw(c2154.08,1995.92) 2115.84,2034.16 cw(c2154.08,1995.92) 2154.08,2050 ; 2154.08,2050 cw(c2154.08,2104.08) 2115.84,2065.84 ccw(c2154.08,2104.08) 2154.08,2050 ; 2178.22,2050 ccw(c2178.22,1971.78) 2122.91,2027.09 cw(c2178.22,1971.78) 2178.22,2050 ; 2178.22,2050 cw(c2178.22,2128.22) 2122.91,2072.91 ccw(c2178.22,2128.22) 2178.22,2050
PA3: J1.32 J2.11 | length 1347.7
  Bottom Layer w10: J2.11 2048.4,2101.6 ; J1.32 2773.62,1727.48 2399.5,2101.6 2048.4,2101.6 ; 2033.46,2116.54 ccw(c2006.04,2089.11) 2002.21,2127.71 cw(c2006.04,2089.11) 2033.46,2116.54 ; 2033.46,2116.54 cw(c2060.89,2143.96) 2022.29,2147.79 ccw(c2060.89,2143.96) 2033.46,2116.54 ; 2048.4,2101.6 ccw(c2008.74,2061.94) 2003.2,2117.76 cw(c2008.74,2061.94) 2048.4,2101.6 ; 2048.4,2101.6 cw(c2088.07,2141.27) 2032.24,2146.8 ccw(c2088.07,2141.27) 2048.4,2101.6
PA4: J1.19 J3.2 | length 1886.6
  Bottom Layer w10: J1.19 3029.53,1756.9 3874.23,2601.6 3941.96,2601.6 ; 3961,2625.38 cw(c4003.17,2614.09) J3.2@3999.33,2657.57 ; J3.2 3990.36,2650 3941.96,2601.6 ; 3941.96,2601.6 cw(c3983.98,2559.58) 3994.35,2618.1 ccw(c3983.98,2559.58) 3941.96,2601.6 ; 3951.5,2611.14 ccw(c3912.65,2650) 3967.6,2650 cw(c3912.65,2650) 3951.5,2611.14 ; 3955.53,2615.17 cw(c3988.07,2582.63) 3996.09,2627.94 ccw(c3988.07,2582.63) 3955.53,2615.17 ; 3968.58,2628.22 ccw(c3946.79,2650) 3977.6,2650 cw(c3946.79,2650) 3968.58,2628.22 ; 3969.1,2628.74 cw(c3992.15,2605.69) 3997.84,2637.79 ccw(c3992.15,2605.69) 3969.1,2628.74
PA5: J1.16 J3.5 | length 1601.9
  Bottom Layer w10: J1.16 3088.58,1748.07 3790.51,2450 J3.5 ; 3821.78,2450 ccw(c3821.78,2528.22) 3877.09,2472.91 cw(c3821.78,2528.22) 3821.78,2450 ; 3821.78,2450 cw(c3821.78,2371.78) 3877.09,2427.09 ccw(c3821.78,2371.78) 3821.78,2450 ; 3845.92,2450 ccw(c3845.92,2504.08) 3884.16,2465.84 cw(c3845.92,2504.08) 3845.92,2450 ; 3845.92,2450 cw(c3845.92,2395.92) 3884.16,2434.16 ccw(c3845.92,2395.92) 3845.92,2450
PA6: J1.17 J3.4 | length 1932.5
  Bottom Layer w10: J1.17 3068.9,1751.02 3816.28,2498.4 3948.4,2498.4 ; 3960.65,2515.79 cw(c4015.54,2504.01) J3.4@3997.57,2557.2 ; 3964.34,2533 cw(c4008.98,2523.42) J3.4@3994.37,2566.67 ; 3965.79,2510.65 ccw(c3954.01,2565.54) J3.4@4007.2,2547.57 ; 3983,2514.34 ccw(c3973.42,2558.98) J3.4@4016.67,2544.37 ; J3.4 3948.4,2498.4 ; 3948.4,2498.4 ccw(c3901.77,2545.04) 3967.64,2548.37 cw(c3901.77,2545.04) 3948.4,2498.4 ; 3948.4,2498.4 cw(c3995.04,2451.77) 3998.37,2517.64 ccw(c3995.04,2451.77) 3948.4,2498.4 ; 3964.33,2514.33 ccw(c3932.08,2546.57) 3977.63,2548.87 cw(c3932.08,2546.57) 3964.33,2514.33 ; 3964.33,2514.33 cw(c3996.57,2482.08) 3998.87,2527.63 ccw(c3996.57,2482.08) 3964.33,2514.33
PA7: J1.18 J3.3 | length 1487.8
  Bottom Layer w10: J1.18 3049.21,1753.96 3845.25,2550 ; J3.3 3845.25,2550 ; 3845.26,2550 ccw(c3845.26,2580.04) 3871.6,2565.59 cw(c3845.26,2580.04) 3845.26,2550 ; 3845.26,2550 cw(c3845.26,2519.96) 3871.6,2534.41 ccw(c3845.26,2519.96) 3845.26,2550 ; 3862.15,2550 ccw(c3862.15,2570.77) 3880.36,2560.78 cw(c3862.15,2570.77) 3862.15,2550 ; 3862.15,2550 cw(c3862.15,2529.23) 3880.36,2539.22 ccw(c3862.15,2529.23) 3862.15,2550
PA10: U2.31
PA15: J1.29 J2.10 | length 1433.4
  Bottom Layer w10: J2.10 2318.98,2250 2832.68,1736.3 J1.29 ; 2154.08,2250 ccw(c2154.08,2195.92) 2115.84,2234.16 cw(c2154.08,2195.92) 2154.08,2250 ; 2154.08,2250 cw(c2154.08,2304.08) 2115.84,2265.84 ccw(c2154.08,2304.08) 2154.08,2250 ; 2178.22,2250 ccw(c2178.22,2171.78) 2122.91,2227.09 cw(c2178.22,2171.78) 2178.22,2250 ; 2178.22,2250 cw(c2178.22,2328.22) 2122.91,2272.91 ccw(c2178.22,2328.22) 2178.22,2250
PB0: J1.11 J3.10 | length 1432
  Bottom Layer w10: J1.11 3187.01,1733.36 3655.24,2201.6 3951.6,2201.6 ; J3.10 3951.6,2201.6 ; 3951.6,2201.6 ccw(c3911.94,2241.27) 3967.76,2246.8 cw(c3911.94,2241.27) 3951.6,2201.6 ; 3951.6,2201.6 cw(c3991.27,2161.94) 3996.8,2217.76 ccw(c3991.27,2161.94) 3951.6,2201.6 ; 3966.54,2216.54 ccw(c3939.11,2243.96) 3977.71,2247.79 cw(c3939.11,2243.96) 3966.54,2216.54 ; 3966.54,2216.54 cw(c3993.96,2189.11) 3997.79,2227.71 ccw(c3993.96,2189.11) 3966.54,2216.54
PB1: J1.12 J3.9 | length 1433.4
  Bottom Layer w10: J1.12 3167.32,1736.3 3681.02,2250 J3.9 ; 3821.78,2250 ccw(c3821.78,2328.22) 3877.09,2272.91 cw(c3821.78,2328.22) 3821.78,2250 ; 3821.78,2250 cw(c3821.78,2171.78) 3877.09,2227.09 ccw(c3821.78,2171.78) 3821.78,2250 ; 3845.92,2250 ccw(c3845.92,2304.08) 3884.16,2265.84 cw(c3845.92,2304.08) 3845.92,2250 ; 3845.92,2250 cw(c3845.92,2195.92) 3884.16,2234.16 ccw(c3845.92,2195.92) 3845.92,2250
PB2: J1.37 J2.18 | length 1096.5
  Bottom Layer w10: J2.18 2537.96,1850 2675.2,1712.77 J1.37 ; 2154.08,1850 ccw(c2154.08,1795.92) 2115.84,1834.16 cw(c2154.08,1795.92) 2154.08,1850 ; 2154.08,1850 cw(c2154.08,1904.08) 2115.84,1865.84 ccw(c2154.08,1904.08) 2154.08,1850 ; 2178.22,1850 ccw(c2178.22,1771.78) 2122.91,1827.09 cw(c2178.22,1771.78) 2178.22,1850 ; 2178.22,1850 cw(c2178.22,1928.22) 2122.91,1872.91 ccw(c2178.22,1928.22) 2178.22,1850
PB3: J1.26 J2.5@2000,2450 | length 1600.4
  Bottom Layer w10: J2.5@2000,2450 2048.4,2401.6 ; J1.26 2891.73,1745.13 2235.27,2401.6 2048.4,2401.6 ; 2033.46,2416.54 ccw(c2006.04,2389.11) 2002.21,2427.71 cw(c2006.04,2389.11) 2033.46,2416.54 ; 2033.46,2416.54 cw(c2060.89,2443.96) 2022.29,2447.79 ccw(c2060.89,2443.96) 2033.46,2416.54 ; 2048.4,2401.6 ccw(c2008.74,2361.94) 2003.2,2417.76 cw(c2008.74,2361.94) 2048.4,2401.6 ; 2048.4,2401.6 cw(c2088.07,2441.27) 2032.24,2446.8 ccw(c2088.07,2441.27) 2048.4,2401.6
PB4: J1.30 J2.9 | length 1432
  Bottom Layer w10: J2.9 2048.4,2201.6 ; J1.30 2812.99,1733.36 2344.76,2201.6 2048.4,2201.6 ; 2033.46,2216.54 ccw(c2006.04,2189.11) 2002.21,2227.71 cw(c2006.04,2189.11) 2033.46,2216.54 ; 2033.46,2216.54 cw(c2060.89,2243.96) 2022.29,2247.79 ccw(c2060.89,2243.96) 2033.46,2216.54 ; 2048.4,2201.6 ccw(c2008.74,2161.94) 2003.2,2217.76 cw(c2008.74,2161.94) 2048.4,2201.6 ; 2048.4,2201.6 cw(c2088.07,2241.27) 2032.24,2246.8 ccw(c2088.07,2241.27) 2048.4,2201.6
PB6: J1.6 J3.15 | length 1180.7
  Bottom Layer w10: J1.6 3285.43,1718.65 3516.78,1950 J3.15 ; 3821.78,1950 ccw(c3821.78,2028.22) 3877.09,1972.91 cw(c3821.78,2028.22) 3821.78,1950 ; 3821.78,1950 cw(c3821.78,1871.78) 3877.09,1927.09 ccw(c3821.78,1871.78) 3821.78,1950 ; 3845.92,1950 ccw(c3845.92,2004.08) 3884.16,1965.84 cw(c3845.92,2004.08) 3845.92,1950 ; 3845.92,1950 cw(c3845.92,1895.92) 3884.16,1934.16 ccw(c3845.92,1895.92) 3845.92,1950
PB7: J1.13 J3.8 | length 1516.2
  Bottom Layer w10: J1.13 3147.64,1739.25 3709.99,2301.6 3951.6,2301.6 ; J3.8 3951.6,2301.6 ; 3951.6,2301.6 ccw(c3911.94,2341.27) 3967.76,2346.8 cw(c3911.94,2341.27) 3951.6,2301.6 ; 3951.6,2301.6 cw(c3991.27,2261.94) 3996.8,2317.76 ccw(c3991.27,2261.94) 3951.6,2301.6 ; 3966.54,2316.54 ccw(c3939.11,2343.96) 3977.71,2347.79 cw(c3939.11,2343.96) 3966.54,2316.54 ; 3966.54,2316.54 cw(c3993.96,2289.11) 3997.79,2327.71 ccw(c3993.96,2289.11) 3966.54,2316.54
PB8: J1.2@3364.17,1663.98 J3.19 | length 1012.2
  Bottom Layer w10: J1.2@3364.17,1663.98 3364.17,1706.88 3407.29,1750 J3.19 ; 3821.78,1750 ccw(c3821.78,1828.22) 3877.09,1772.91 cw(c3821.78,1828.22) 3821.78,1750 ; 3821.78,1750 cw(c3821.78,1671.78) 3877.09,1727.09 ccw(c3821.78,1671.78) 3821.78,1750 ; 3845.92,1750 ccw(c3845.92,1804.08) 3884.16,1765.84 cw(c3845.92,1804.08) 3845.92,1750 ; 3845.92,1750 cw(c3845.92,1695.92) 3884.16,1734.16 ccw(c3845.92,1695.92) 3845.92,1750
PB9: J1.3 J3.18 | length 1095
  Bottom Layer w10: J1.3 3344.49,1709.82 3436.26,1801.6 3951.6,1801.6 ; J3.18 3951.6,1801.6 ; 3951.6,1801.6 ccw(c3911.94,1841.27) 3967.76,1846.8 cw(c3911.94,1841.27) 3951.6,1801.6 ; 3951.6,1801.6 cw(c3991.27,1761.94) 3996.8,1817.76 ccw(c3991.27,1761.94) 3951.6,1801.6 ; 3966.54,1816.54 ccw(c3939.11,1843.96) 3977.71,1847.79 cw(c3939.11,1843.96) 3966.54,1816.54 ; 3966.54,1816.54 cw(c3993.96,1789.11) 3997.79,1827.71 ccw(c3993.96,1789.11) 3966.54,1816.54
PB10: J1.38 J2.17 | length 1095
  Bottom Layer w10: J2.17 2048.4,1801.6 ; J1.38 2655.51,1709.82 2563.74,1801.6 2048.4,1801.6 ; 2033.46,1816.54 ccw(c2006.04,1789.11) 2002.21,1827.71 cw(c2006.04,1789.11) 2033.46,1816.54 ; 2033.46,1816.54 cw(c2060.89,1843.96) 2022.29,1847.79 ccw(c2060.89,1843.96) 2033.46,1816.54 ; 2048.4,1801.6 ccw(c2008.74,1761.94) 2003.2,1817.76 cw(c2008.74,1761.94) 2048.4,1801.6 ; 2048.4,1801.6 cw(c2088.07,1841.27) 2032.24,1846.8 ccw(c2088.07,1841.27) 2048.4,1801.6
PB11: J1.36 J2.15 | length 1179.3
  Bottom Layer w10: J2.15 2048.4,1901.6 ; J1.36 2694.88,1715.71 2508.99,1901.6 2048.4,1901.6 ; 2033.46,1916.54 ccw(c2006.04,1889.11) 2002.21,1927.71 cw(c2006.04,1889.11) 2033.46,1916.54 ; 2033.46,1916.54 cw(c2060.89,1943.96) 2022.29,1947.79 ccw(c2060.89,1943.96) 2033.46,1916.54 ; 2048.4,1901.6 ccw(c2008.74,1861.94) 2003.2,1917.76 cw(c2008.74,1861.94) 2048.4,1901.6 ; 2048.4,1901.6 cw(c2088.07,1941.27) 2032.24,1946.8 ccw(c2088.07,1941.27) 2048.4,1901.6
PB12: J1.4 J3.17 | length 1096.5
  Bottom Layer w10: J1.4 3324.8,1712.77 3462.04,1850 J3.17 ; 3821.78,1850 ccw(c3821.78,1928.22) 3877.09,1872.91 cw(c3821.78,1928.22) 3821.78,1850 ; 3821.78,1850 cw(c3821.78,1771.78) 3877.09,1827.09 ccw(c3821.78,1771.78) 3821.78,1850 ; 3845.92,1850 ccw(c3845.92,1904.08) 3884.16,1865.84 cw(c3845.92,1904.08) 3845.92,1850 ; 3845.92,1850 cw(c3845.92,1795.92) 3884.16,1834.16 ccw(c3845.92,1795.92) 3845.92,1850
PB13: J1.5 J3.16 | length 1179.2
  Bottom Layer w10: J1.5 3305.12,1715.71 3491.01,1901.6 3951.6,1901.6 ; J3.16 3951.6,1901.6 ; 3951.6,1901.6 ccw(c3911.94,1941.27) 3967.76,1946.8 cw(c3911.94,1941.27) 3951.6,1901.6 ; 3951.6,1901.6 cw(c3991.27,1861.94) 3996.8,1917.76 ccw(c3991.27,1861.94) 3951.6,1901.6 ; 3966.54,1916.54 ccw(c3939.11,1943.96) 3977.71,1947.79 cw(c3939.11,1943.96) 3966.54,1916.54 ; 3966.54,1916.54 cw(c3993.96,1889.11) 3997.79,1927.71 ccw(c3993.96,1889.11) 3966.54,1916.54
PB14: J1.7 J3.14 | length 1263.5
  Bottom Layer w10: J1.7 3265.75,1721.59 3545.75,2001.6 3951.6,2001.6 ; J3.14 3951.6,2001.6 ; 3951.6,2001.6 ccw(c3911.94,2041.27) 3967.76,2046.8 cw(c3911.94,2041.27) 3951.6,2001.6 ; 3951.6,2001.6 cw(c3991.27,1961.94) 3996.8,2017.76 ccw(c3991.27,1961.94) 3951.6,2001.6 ; 3966.54,2016.54 ccw(c3939.11,2043.96) 3977.71,2047.79 cw(c3939.11,2043.96) 3966.54,2016.54 ; 3966.54,2016.54 cw(c3993.96,1989.11) 3997.79,2027.71 ccw(c3993.96,1989.11) 3966.54,2016.54
PB15: J1.9 J3.12 | length 1347.7
  Bottom Layer w10: J1.9 3226.38,1727.48 3600.5,2101.6 3951.6,2101.6 ; J3.12 3951.6,2101.6 ; 3951.6,2101.6 ccw(c3911.94,2141.27) 3967.76,2146.8 cw(c3911.94,2141.27) 3951.6,2101.6 ; 3951.6,2101.6 cw(c3991.27,2061.94) 3996.8,2117.76 ccw(c3991.27,2061.94) 3951.6,2101.6 ; 3966.54,2116.54 ccw(c3939.11,2143.96) 3977.71,2147.79 cw(c3939.11,2143.96) 3966.54,2116.54 ; 3966.54,2116.54 cw(c3993.96,2089.11) 3997.79,2127.71 ccw(c3993.96,2089.11) 3966.54,2116.54
PC0: J1.24 J2.3@2000,2550 | length 1932.5
  Bottom Layer w10: J2.3@1983.33,2544.37 ccw(c2026.58,2558.98) 2017,2514.34 ; J2.3@1992.8,2547.57 ccw(c2045.99,2565.54) 2034.21,2510.65 ; J2.3@2000,2550 2051.6,2498.4 ; J2.3@2002.43,2557.2 cw(c1984.48,2504.02) 2039.35,2515.8 ; J2.3@2005.63,2566.67 cw(c1991.03,2523.42) 2035.66,2533 ; J1.24 2931.1,1751.02 2183.72,2498.4 2051.6,2498.4 ; 2035.67,2514.33 ccw(c2003.43,2482.08) 2001.13,2527.63 cw(c2003.43,2482.08) 2035.67,2514.33 ; 2035.67,2514.33 cw(c2067.92,2546.58) 2022.37,2548.87 ccw(c2067.92,2546.58) 2035.67,2514.33 ; 2051.6,2498.4 ccw(c2004.96,2451.76) 2001.63,2517.64 cw(c2004.96,2451.76) 2051.6,2498.4 ; 2051.6,2498.4 cw(c2098.24,2545.05) 2032.36,2548.37 ccw(c2098.24,2545.05) 2051.6,2498.4
PC1: J1.23 J2.4@2100,2550 | length 1487.8
  Bottom Layer w10: J2.4@2100,2550 2154.75,2550 ; J1.23 2950.79,1753.96 2154.75,2550 ; 2137.85,2550 ccw(c2137.85,2529.23) 2119.64,2539.22 cw(c2137.85,2529.23) 2137.85,2550 ; 2137.85,2550 cw(c2137.85,2570.77) 2119.64,2560.78 ccw(c2137.85,2570.77) 2137.85,2550 ; 2154.75,2550 ccw(c2154.75,2519.95) 2128.4,2534.41 cw(c2154.75,2519.95) 2154.75,2550 ; 2154.75,2550 cw(c2154.75,2580.05) 2128.4,2565.59 ccw(c2154.75,2580.05) 2154.75,2550
PC2: J1.22 J2.1@2000,2650 | length 1886.6
  Bottom Layer w10: J2.1@2000,2650 2009.64,2650 2058.04,2601.6 ; J2.1@2000.67,2657.57 cw(c1996.83,2614.09) 2039,2625.39 ; J1.22 2970.47,1756.9 2125.78,2601.6 2058.04,2601.6 ; 2058.04,2601.6 ccw(c2016.02,2559.58) 2005.65,2618.1 cw(c2016.02,2559.58) 2058.04,2601.6 ; J2.1@2002.16,2637.79 cw(c2007.85,2605.69) 2030.9,2628.74 ccw(c2007.85,2605.69) J2.1@2002.16,2637.79 ; J2.1@2003.91,2627.94 cw(c2011.94,2582.63) 2044.47,2615.17 ccw(c2011.94,2582.63) J2.1@2003.91,2627.94 ; J2.1@2022.4,2650 ccw(c2053.2,2650) 2031.42,2628.22 cw(c2053.2,2650) J2.1@2022.4,2650 ; J2.1@2032.4,2650 ccw(c2087.35,2650) 2048.49,2611.15 cw(c2087.35,2650) J2.1@2032.4,2650
PC3: J1.31 J2.12 | length 1349.2
  Bottom Layer w10: J2.12 2373.73,2150 2793.31,1730.42 J1.31 ; 2154.08,2150 ccw(c2154.08,2095.92) 2115.84,2134.16 cw(c2154.08,2095.92) 2154.08,2150 ; 2154.08,2150 cw(c2154.08,2204.08) 2115.84,2165.84 ccw(c2154.08,2204.08) 2154.08,2150 ; 2178.22,2150 ccw(c2178.22,2071.78) 2122.91,2127.09 cw(c2178.22,2071.78) 2178.22,2150 ; 2178.22,2150 cw(c2178.22,2228.22) 2122.91,2172.91 ccw(c2178.22,2228.22) 2178.22,2150
PC4: J1.15 J3.6 | length 1600.4
  Bottom Layer w10: J1.15 3108.27,1745.13 3764.74,2401.6 3951.6,2401.6 ; J3.6 3951.6,2401.6 ; 3951.6,2401.6 ccw(c3911.94,2441.27) 3967.76,2446.8 cw(c3911.94,2441.27) 3951.6,2401.6 ; 3951.6,2401.6 cw(c3991.27,2361.94) 3996.8,2417.76 ccw(c3991.27,2361.94) 3951.6,2401.6 ; 3966.54,2416.54 ccw(c3939.11,2443.96) 3977.71,2447.79 cw(c3939.11,2443.96) 3966.54,2416.54 ; 3966.54,2416.54 cw(c3993.96,2389.11) 3997.79,2427.71 ccw(c3993.96,2389.11) 3966.54,2416.54
PC5: J1.10 J3.11 | length 1349.2
  Bottom Layer w10: J1.10 3206.69,1730.42 3626.27,2150 J3.11 ; 3821.78,2150 ccw(c3821.78,2228.22) 3877.09,2172.91 cw(c3821.78,2228.22) 3821.78,2150 ; 3821.78,2150 cw(c3821.78,2071.78) 3877.09,2127.09 ccw(c3821.78,2071.78) 3821.78,2150 ; 3845.92,2150 ccw(c3845.92,2204.08) 3884.16,2165.84 cw(c3845.92,2204.08) 3845.92,2150 ; 3845.92,2150 cw(c3845.92,2095.92) 3884.16,2134.16 ccw(c3845.92,2095.92) 3845.92,2150
PC7: J1.14 J3.7 | length 1517.7
  Bottom Layer w10: J1.14 3127.95,1742.19 3735.76,2350 J3.7 ; 3821.78,2350 ccw(c3821.78,2428.22) 3877.09,2372.91 cw(c3821.78,2428.22) 3821.78,2350 ; 3821.78,2350 cw(c3821.78,2271.78) 3877.09,2327.09 ccw(c3821.78,2271.78) 3821.78,2350 ; 3845.92,2350 ccw(c3845.92,2404.08) 3884.16,2365.84 cw(c3845.92,2404.08) 3845.92,2350 ; 3845.92,2350 cw(c3845.92,2295.92) 3884.16,2334.16 ccw(c3845.92,2295.92) 3845.92,2350
TCK: J1.28 J2.4@2655,2285 J2.7 U2.26 | length 3477.8
  Top Layer w10: J2.7 2050,2300 ; J2.7@2001.66,2327.66 cw(c2004.77,2285.64) 2034.57,2315.43 cw(c2064.36,2345.23) J2.7@2022.34,2348.34 ; J2.7@2002.4,2317.69 cw(c2006.9,2256.9) 2050,2300 ; J2.7@2032.31,2347.6 ccw(c2093.1,2343.1) 2050,2300 ; v1@2490.81,2290.81 ccw(c2468.62,2268.62) 2468.62,2300 ccw(c2468.62,2331.38) v1@2490.81,2309.19 ; v1(2500,2300) 2050,2300
  Top Layer w11: v1@3057.5,2475 v1@3065,2475 ; v1(3065,2480) 3071.54,2480 3126.08,2534.54 U2.26@3126.08,2570
  Bottom Layer w10: J2.7 2048.4,2301.6 ; J2.7@2002.21,2327.71 cw(c2006.04,2289.11) 2033.46,2316.54 cw(c2060.89,2343.96) J2.7@2022.29,2347.79 ; J2.7@2003.2,2317.76 cw(c2008.74,2261.94) 2048.4,2301.6 ; J2.7@2032.24,2346.8 ccw(c2088.07,2341.27) 2048.4,2301.6 ; J1.28 2852.36,1739.25 2290.01,2301.6 2048.4,2301.6
  Bottom Layer w11: v1(2500,2300) 2791.5,2300 2950,2458.5 3043.5,2458.5 v1(3065,2480) ; v1@2508.84,2291.16 cw(c2530.18,2269.82) 2530.18,2300 cw(c2530.18,2330.18) v1@2508.84,2308.84 ; 2524.03,2300 cw(c2524.03,2171.53) J2.4@2614.87,2262.37 ; 2550.59,2300 cw(c2550.59,2198.09) J2.4@2622.65,2270.15 ; 2577.14,2300 cw(c2577.14,2224.64) J2.4@2630.43,2277.93 ; 2596.46,2300 ccw(c2596.46,2326.04) J2.4@2614.87,2307.63 ; J2.4@2679.57,2277.93 cw(c2732.86,2224.64) 2732.86,2300 ; J2.4@2687.35,2270.15 cw(c2759.41,2198.09) 2759.41,2300 ; J2.4@2695.13,2262.37 cw(c2785.97,2171.53) 2785.97,2300 ; J2.4@2695.13,2307.63 ccw(c2713.54,2326.04) 2713.54,2300 ; v1@3052.5,2480 cw(c3022.32,2480) 3043.66,2458.66 cw(c3065,2437.32) v1@3065,2467.5
TMS: J1.27 J2.3@2655,2385 J2.8 R5.1 U2.27 | length 4362.8
  Top Layer w11: J2.8 v1(2475,2350) ; J2.8@2114.78,2335.22 cw(c2150.46,2299.54) 2150.46,2350 cw(c2150.46,2400.46) J2.8@2114.78,2364.78 ; J2.8@2122.56,2327.44 cw(c2177.02,2272.98) 2177.02,2350 cw(c2177.02,2427.02) J2.8@2122.56,2372.56 ; v1@2466.16,2341.16 ccw(c2444.82,2319.82) 2444.82,2350 ccw(c2444.82,2380.18) v1@2466.16,2358.84 ; v1(3030,2510) 3077.5,2510 3106.4,2538.9 U2.27 3106.4,2640.67 ; v1@3038.84,2501.16 cw(c3060.18,2479.82) 3060.18,2510 cw(c3060.18,2540.18) v1@3038.84,2518.84 ; R5.1 3106.4,2640.67 ; R5.1@3081.44,2651.45 cw(c3081.44,2617.2) 3105.65,2641.42 ; 3097.91,2530.41 ccw(c3078.4,2549.92) U2.27@3105.99,2549.92 ; R5.1@3099.13,2665.64 ccw(c3125.5,2659.78) 3106.4,2640.67
  Bottom Layer w10: J2.8 2264.24,2350 2872.05,1742.19 J1.27 ; 2154.08,2350 ccw(c2154.08,2295.92) 2115.84,2334.16 cw(c2154.08,2295.92) 2154.08,2350 ; 2154.08,2350 cw(c2154.08,2404.08) 2115.84,2365.84 ccw(c2154.08,2404.08) 2154.08,2350 ; 2178.22,2350 ccw(c2178.22,2271.78) 2122.91,2327.09 cw(c2178.22,2271.78) 2178.22,2350 ; 2178.22,2350 cw(c2178.22,2428.22) 2122.91,2372.91 ccw(c2178.22,2428.22) 2178.22,2350
  Bottom Layer w11: v1(2475,2350) 2810,2350 ; v1@2475.75,2350 ccw(c2475.75,2546.75) J2.3@2614.87,2407.63 ; v1@2482.64,2359.9 ccw(c2501.27,2384.04) 2505.17,2353.79 ; v1@2483.84,2341.16 cw(c2505.18,2319.82) 2505.18,2350 cw(c2505.18,2380.18) v1@2483.84,2358.84 ; v1@2484.9,2342.36 cw(c2508.53,2324.12) 2504.71,2353.73 ; 2502.3,2350 ccw(c2502.3,2520.2) J2.3@2622.65,2399.85 ; 2528.86,2350 ccw(c2528.86,2493.64) J2.3@2630.43,2392.07 ; 2555.42,2350 ccw(c2555.42,2467.08) J2.3@2638.21,2384.29 ; 2581.97,2350 ccw(c2581.97,2440.53) J2.3@2645.99,2376.51 ; 2608.53,2350 ccw(c2608.53,2413.97) J2.3@2653.76,2368.74 ; J2.3@2654.39,2370.83 ccw(c2697.13,2404.27) 2697.13,2350 ; J2.3@2663.05,2377.61 ccw(c2719.7,2421.93) 2719.7,2350 ; J2.3@2671.71,2384.38 ccw(c2742.27,2439.59) 2742.27,2350 ; J2.3@2680.38,2391.16 ccw(c2764.85,2457.25) 2764.85,2350 ; J2.3@2689.04,2397.94 ccw(c2787.42,2474.91) 2787.42,2350 ; J2.3@2697.7,2404.72 ccw(c2809.99,2492.58) 2809.99,2350 ; v1(3030,2510) 3030,2505.78 2999.72,2475.5 2935.5,2475.5 2810,2350
USBDM: R2.1 U1.2 | length 196.7
  Top Layer w12: U1.2@2958.09,2851.89 2958.09,2784.84 R2.1 ; 2965.7,2777.24 cw(c2928.89,2740.43) R2.1@2980.94,2740.43 ; 2975.2,2767.73 ccw(c2998.56,2791.09) R2.1@2998.56,2758.06
USBDP: R1.2 R4.1 U1.3 | length 524.2
  Top Layer w12: R1.2 2778.6,2740.43 2814.22,2776.06 2879.28,2776.06 ; R1.2@2776.44,2758.06 ccw(c2776.44,2805.82) 2810.21,2772.04 ; R1.2@2794.06,2740.43 cw(c2831.39,2740.43) 2804.99,2766.83 ; 2899.47,2755.87 ccw(c2923.16,2779.55) R4.1@2923.5,2746.06 ; 2899.61,2755.73 cw(c2884.31,2740.43) R4.1@2905.94,2740.43 ; R4.1@2918.98,2752.89 ccw(c2886.33,2785.54) 2932.5,2785.54 ; R4.1@2923.38,2758.06 cw(c2922.74,2819.51) 2879.28,2776.05 ; 2932.5,2780.41 ccw(c2971.41,2780.41) R4.1@2943.9,2752.89 ; U1.3@2932.5,2851.89 2932.5,2745.43 R4.1 2914.9,2740.43 2879.28,2776.06
pads on no net: C1.1 C1.2 C2.1 C2.2 C3.1@2942.91,1500 C3.2@3057.09,1500 U1.0@2789.78,2973.46 U1.0@2837.03,2868.15 U1.0@3027.97,2868.15 U1.0@3075.22,2973.46 U2.3 U2.4 U2.11 U2.12 U2.13 U2.14 U2.15 U2.16 U2.17 U2.18 U2.19 U2.21 U2.22 U2.28 U2.29 U2.34 U2.39 U2.40 U2.41 U2.42 U2.43 U2.45 U2.46 U13.4

## Polygon pours and split planes (outlines as drawn)
GND on Bottom Layer "Keep-Out Layer-No Net" (solid, pour order 2): 1840.82,3030.82 4160.82,3030.82 4160.82,1400.82 1840.82,1400.82
GND on Top Layer "Keep-Out Layer-No Net" (solid, pour order 4): 1840,3030 4160,3030 4160,1400 1840,1400

## Keep-outs
Keep-Out Layer:
  lines w6: 2747.5,3030 2712.5,3030 3287.5,3030 ; 1840,1400 4160,1400 4160,3030 1840,3030 1840,1400

## Silkscreen, mask and mechanical layers (free items; w line width, h text height)
Top Overlay:
  lines w6: 2250.79,1700 ccw(c2550.79,1700) 2550.79,1400 3449.21,1400 ccw(c3449.21,1700) 3749.21,1700 3749.21,2728.23 ccw(c3449.21,2728.23) 3449.21,3028.23 2550.79,3028.23 ccw(c2550.79,2728.23) 2250.79,2728.23 2250.79,1700
  text "PC2" at 1850,2630 h31.5
  text "3V3" at 2160,2630 h31.5
  text "3V3" at 3760,2630 h31.5
  text "PA4" at 4060,2630 h31.5
  text "PC0" at 1850,2530 h31.5
  text "PC1" at 2160,2530 h31.5
  text "PA7" at 3760,2530 h31.5
  text "PA6" at 4060,2530 h31.5
  text "PB3" at 1850,2430 h31.5
  text "PA0" at 2160,2430 h31.5
  text "PA5" at 3760,2430 h31.5
  text "PC4" at 4060,2430 h31.5
  text "A14" at 1850,2350 h31.5
  text "A13" at 2160,2350 h31.5
  text "PC7" at 3760,2330 h31.5
  text "PB7" at 4060,2330 h31.5
  text "CLK" at 1850,2310 h31.5
  text "DIO" at 2160,2310 h31.5
  text "PB4" at 1850,2230 h31.5
  text "A15" at 2160,2230 h31.5
  text "PB1" at 3760,2230 h31.5
  text "PB0" at 4060,2230 h31.5
  text "PA3" at 1850,2130 h31.5
  text "PC3" at 2160,2130 h31.5
  text "PC5" at 3760,2130 h31.5
  text "B15" at 4060,2130 h31.5
  text "PA1" at 1850,2030 h31.5
  text "PA2" at 2160,2030 h31.5
  text "RST" at 3760,2030 h31.5
  text "B14" at 4060,2030 h31.5
  text "B11" at 1850,1930 h31.5
  text "BT0" at 2160,1930 h31.5
  text "PB6" at 3760,1930 h31.5
  text "B13" at 4060,1930 h31.5
  text "PB2" at 2160,1850 h31.5
  text "B10" at 1850,1830 h31.5
  text "B12" at 3760,1830 h31.5
  text "PB9" at 4060,1830 h31.5
  text "BT1" at 2160,1810 h31.5
  text "GND" at 1850,1730 h31.5
  text "5V" at 2170,1730 h31.5
  text "PB8" at 3760,1730 h31.5
  text "GND" at 4060,1730 h31.5
Bottom Overlay:
  text "PC2" at 1935,2630 h31.5
  text "3V3" at 2245,2630 h31.5
  text "3V3" at 3845,2630 h31.5
  text "PA4" at 4145,2630 h31.5
  text "PC0" at 1935,2530 h31.5
  text "PC1" at 2245,2530 h31.5
  text "PA7" at 3845,2530 h31.5
  text "PA6" at 4145,2530 h31.5
  text "PB3" at 1935,2430 h31.5
  text "PA0" at 2245,2430 h31.5
  text "PA5" at 3845,2430 h31.5
  text "PC4" at 4145,2430 h31.5
  text "A14" at 1935,2350 h31.5
  text "A13" at 2245,2350 h31.5
  text "PC7" at 3845,2330 h31.5
  text "PB7" at 4145,2330 h31.5
  text "CLK" at 1935,2310 h31.5
  text "DIO" at 2245,2310 h31.5
  text "PB4" at 1935,2230 h31.5
  text "A15" at 2245,2230 h31.5
  text "PB1" at 3845,2230 h31.5
  text "PB0" at 4145,2230 h31.5
  text "PA3" at 1935,2130 h31.5
  text "PC3" at 2245,2130 h31.5
  text "PC5" at 3845,2130 h31.5
  text "B15" at 4145,2130 h31.5
  text "PA1" at 1935,2030 h31.5
  text "PA2" at 2245,2030 h31.5
  text "RST" at 3845,2030 h31.5
  text "B14" at 4145,2030 h31.5
  text "B11" at 1935,1930 h31.5
  text "BT0" at 2245,1930 h31.5
  text "PB6" at 3845,1930 h31.5
  text "B13" at 4145,1930 h31.5
  text "PB2" at 2245,1850 h31.5
  text "B10" at 1935,1830 h31.5
  text "B12" at 3845,1830 h31.5
  text "PB9" at 4145,1830 h31.5
  text "BT1" at 2245,1810 h31.5
  text "GND" at 1935,1730 h31.5
  text "5V" at 2255,1730 h31.5
  text "PB8" at 3845,1730 h31.5
  text "GND" at 4145,1730 h31.5
Top Solder:
  text "DIPBoard" at 3195,1500 h59.06
  text "MAGI" at 3340,1415 h39.37